# Altium PCB PCB1.PcbDoc
Units mm, origin at the board's own origin, x right, y up, seen from the top; angles counter-clockwise.
Board outline 40.64 x 67.69 mm, 2 copper layers (Top Layer, Bottom Layer); 11 components, 20 nets, 80 pads, 11 vias.
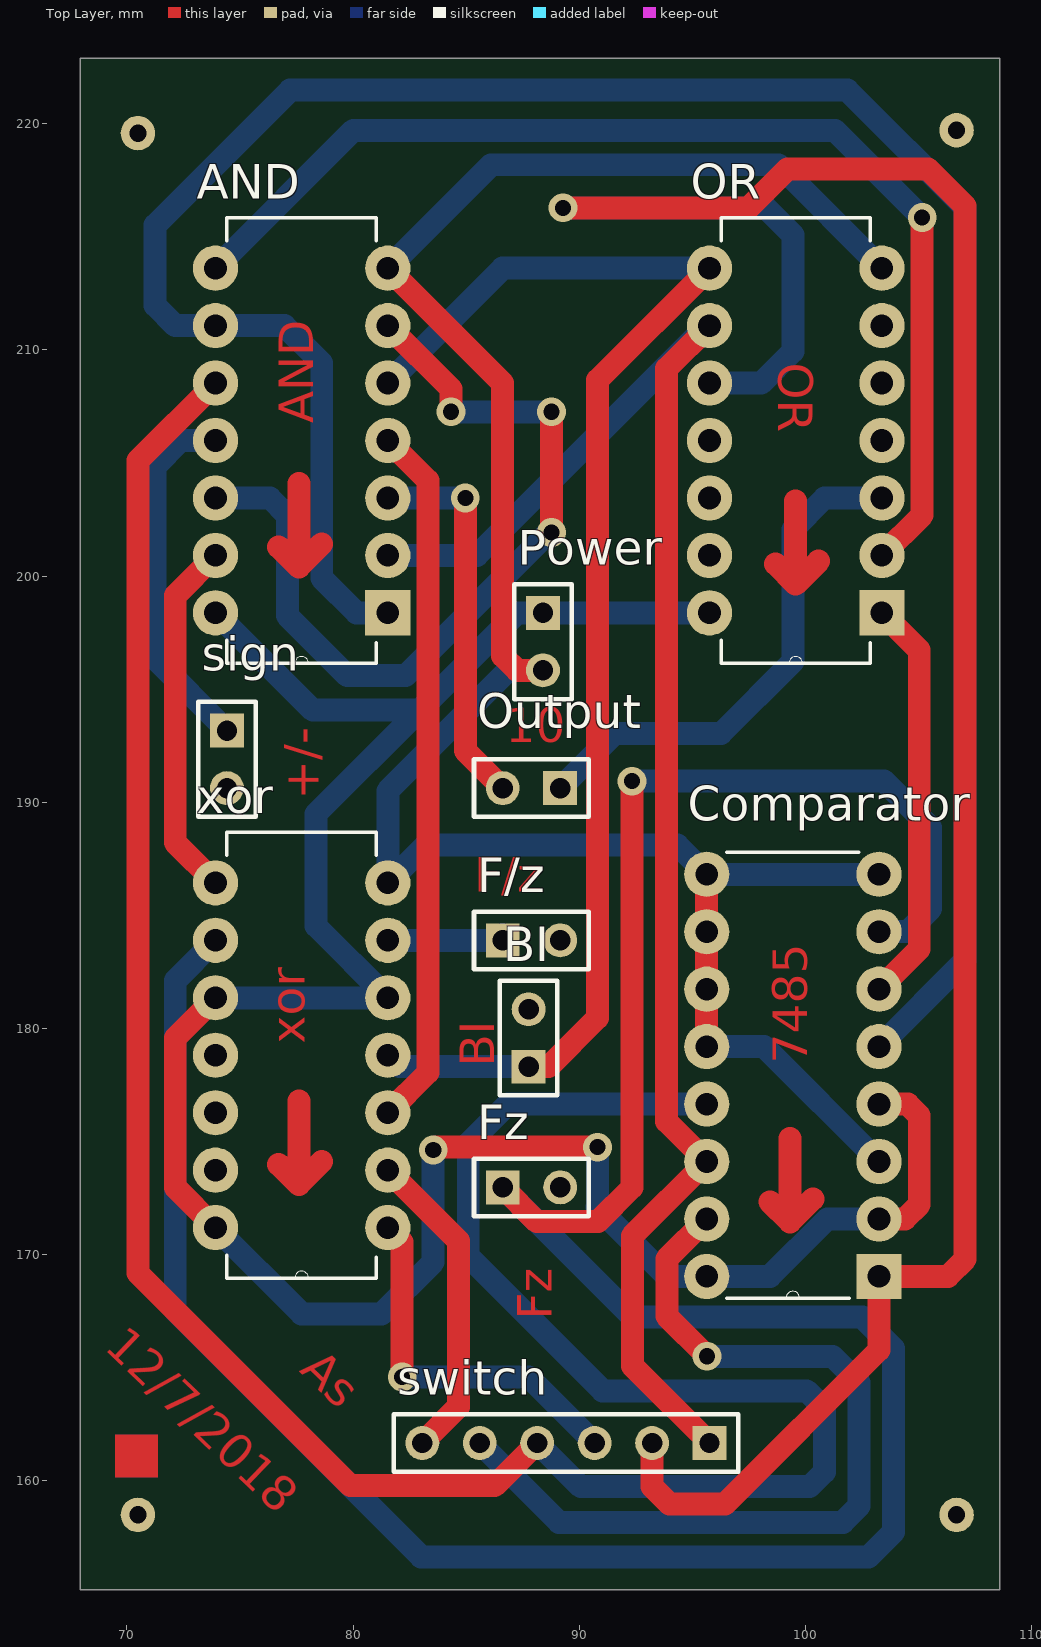
[diagram p0: Top Layer view]
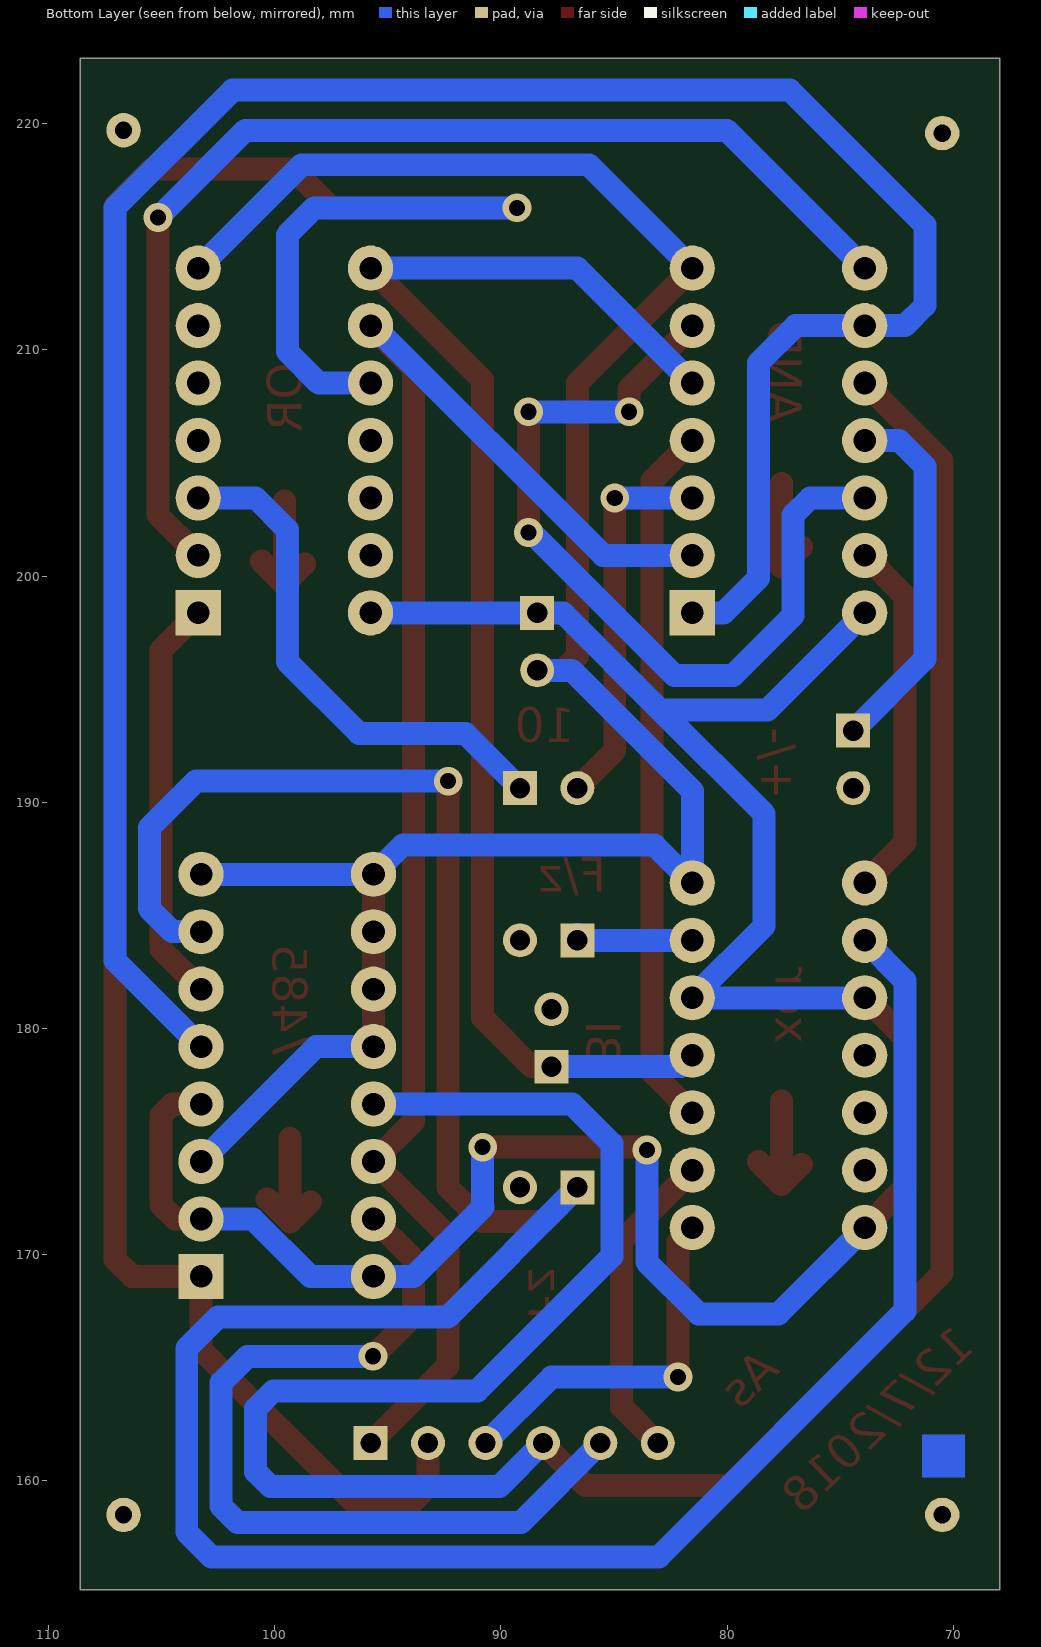
[diagram p1: Bottom Layer view, seen from below]

## Layer stack, top to bottom
Top Solder: solder mask 0.0102, Solder Resist, Dk 3.5
Top Layer: signal copper 0.0356
Dielectric 1: dielectric 0.32, FR-4, Dk 4.8
Bottom Layer: signal copper 0.0356
Bottom Solder: solder mask 0.0102, Solder Resist, Dk 3.5

## Board outline
67.945,155.194 67.945,222.885 108.585,222.885 108.585,155.194

## Design rules (kind name [scope] priority, off if disabled: settings)
Clearance [All] p1: gap=0.254 ignorepadtopadclearanceinfootprint=FALSE except(0: SMDPad-Hole THPad-Hole Via-Hole Fill-Hole Poly-Hole Region-Hole Text-Hole; 0.127: Arc-Hole Track-Hole; 0.508: Arc-Arc Arc-Track Track-Track)
PolygonConnect [All] p1: connectstyle=Relief reliefconductorwidth=0.254 reliefentries=4 polygonreliefangle="90 Angle" airgapwidth=0.254
RoutingVias [All] p1: holewidth=0.711 width=1.27 viastyle="Through Hole" minholewidth=0.711 minwidth=1.27 maxholewidth=0.711 maxwidth=1.27
SolderMaskExpansion [All] p1: expansion=0.102
Width [All] p1: maxlimit=1.016 minlimit=1.016 preferedwidth=1.016 minimp=50.000000 maximp=50.000000 favimp=50.000000
30 further rules are at their usual default settings.

## Components (designator, comment, footprint, x,y, rotation, side; value= is the part's Value field where it differs from the comment)
AND "SN74HC08N" DIP254P762X508-14#1 73.914,213.614 r180 top
BI "Header 2" HDR1X2 87.757,178.308 r90 top
Comparator "SN74LS85N" DIP254P762X508-16 95.631,186.817 r180 top
F/z "F/z" HDR1X2 86.614,183.896 r0 top
Fz "Header 2" HDR1X2 86.614,172.974 r0 top
OR "SN7432N" DIP254P762X508-14#1 95.758,213.614 r180 top
Output "outPut" HDR1X2 89.154,190.627 r180 top
Power "Header 2" HDR1X2 88.392,198.374 r270 top
sign "Sign" HDR1X2 74.422,193.167 r270 top
switch "Header 6" HDR1X6 95.758,161.671 r180 top
xor "SN74HC86N" DIP254P762X508-14#2 73.914,186.436 r180 top

## Footprints (in the part's own frame and the unit in brackets; to place one, negate y for a bottom-side part, rotate by r counter-clockwise, add the part's x,y. Pads: shape width x height; smd on the part's side, far side on the other; paste and mask are expansions set on the pad)
DIP254P762X508-14#1 [mm]
  rect 2x2 hole 1: 1(-7.62,15.24)
  round 2 hole 1: 2(-7.62,12.7) 3(-7.62,10.16) 4(-7.62,7.62) 5(-7.62,5.08) 6(-7.62,2.54) 7(-7.62,0) 8(0,0) 9(0,2.54) 10(0,5.08) 11(0,7.62) 12(0,10.16) 13(0,12.7) 14(0,15.24)
  silkscreen extent -7.11,-2.24 -0.51,17.48
DIP254P762X508-14#2 [mm]
  round 2 hole 1: 1(-7.62,15.24) 2(-7.62,12.7) 3(-7.62,10.16) 4(-7.62,7.62) 5(-7.62,5.08) 6(-7.62,2.54) 7(-7.62,0) 8(0,0) 9(0,2.54) 10(0,5.08) 11(0,7.62) 12(0,10.16) 13(0,12.7) 14(0,15.24)
  silkscreen extent -7.11,-2.24 -0.51,17.48
DIP254P762X508-16 [mm]
  rect 2x2 hole 1: 1(-7.62,17.78)
  round 2 hole 1: 2(-7.62,15.24) 3(-7.62,12.7) 4(-7.62,10.16) 5(-7.62,7.62) 6(-7.62,5.08) 7(-7.62,2.54) 8(-7.62,0) 9(0,0) 10(0,2.54) 11(0,5.08) 12(0,7.62) 13(0,10.16) 14(0,12.7) 15(0,15.24) 16(0,17.78)
  silkscreen extent -6.73,-0.97 -0.89,18.75
HDR1X2 [mm] "Connector; Header; 2 Position"
  rect 1.5x1.5 hole 0.9: 1(0,0)
  round 1.5 hole 0.9: 2(2.54,0)
  silkscreen extent -1.27,-1.27 3.81,1.27
HDR1X6 [mm] "Connector; Header; 6 Position"
  rect 1.5x1.5 hole 0.9: 1(0,0)
  round 1.5 hole 0.9: 2(2.54,0) 3(5.08,0) 4(7.62,0) 5(10.16,0) 6(12.7,0)
  silkscreen extent -1.27,-1.27 13.97,1.27

## Part data
AND: Package="PDIP-14 Signetics", Availability=Unavailable, MF="Texas Instruments", MP=SN74HC08N, Price=None, SnapEDA_Link=https://www.snapeda.com/parts/SN74HC08N/Texas%20Instruments/view-part/?ref=snap
BI Fz Power: "Header, 2-Pin", LatestRevisionDate=17-Jul-2002, LatestRevisionNote="Re-released for DXP Platform.", Publisher="Altium Limited"
Comparator: "Logic - Digital Comparators 4-bit binary or BCD Magnitude Comparator", Package="DIP-16 Texas Instruments", Availability=Unavailable, MF="Texas Instruments", MP=SN74LS85N, Price=None, SnapEDA_Link=https://www.snapeda.com/parts/SN74LS85N/Texas%20Instruments/view-part/?ref=snap
F/z Output sign: library part "Header 2", "Header, 2-Pin", LatestRevisionDate=17-Jul-2002, LatestRevisionNote="Re-released for DXP Platform.", Publisher="Altium Limited"
OR: "OR Gate 4-Element 2-IN Bipolar 14-Pin PDIP Tube", Package="DIP-14 Texas Instruments", Digi-Key_Part_Number=296-33610-5-ND, Digi-Key_Purchase_URL=https://www.digikey.com.eg/product-detail/en/texas-instruments/SN7432N/296-33610-5-ND/1575185?utm_source=snapeda&utm_medium=aggregator&utm_campaign=symbol, MF="Texas Instruments", MP=SN7432N, SnapEDA_Link=https://www.snapeda.com/parts/SN7432N/Texas%20Instruments/view-part/?ref=snap
switch: "Header, 6-Pin", LatestRevisionDate=17-Jul-2002, LatestRevisionNote="Re-released for DXP Platform.", Publisher="Altium Limited"
xor: "IC: digital; inverter; XOR; Channels: 4; THT; DIP14; Series: HC", Package="SOP-14 Texas Instruments", Availability=Unavailable, MF="Texas Instruments", MP=SN74HC86N, Price=None, SnapEDA_Link=https://www.snapeda.com/parts/SN74HC86N/Texas%20Instruments/view-part/?ref=snap

## Free pads (board coordinates)
  round 1.524 hole 0.762: 3(106.68,158.496) 4(70.485,219.583) 5(106.68,219.71) 6(70.485,158.496)

## Via types
v1: diameter 1.27, hole 0.711, Top Layer to Bottom Layer, 11 vias

## Nets (pads, with @x,y where several pads share a name; then routed paths per layer and width w, separated by ;. In a path a pad name is that pad's centre, name@x,y a point inside that pad or via, vN(x,y) a via of type N, cw(c..) or ccw(c..) an arc to the next point about the centre after c; other vN are vias at no path point)
GND: AND.7 Comparator.3 Comparator.8 Comparator.9 Comparator.10 Comparator.11 Comparator.12 OR.7 Power.2 xor.7 | length 100.3
  Top Layer w1.016: AND.7 86.614,208.534 86.614,196.469 87.249,195.834 Power.2 ; Comparator.12 Comparator.11 Comparator.10 Comparator.9
  Bottom Layer w1.016: AND.7 86.106,218.186 98.806,218.186 OR.7 ; Power.2 86.864,195.834 81.534,190.504 xor.7 83.21,188.112 94.336,188.112 Comparator.9 Comparator.8 ; Comparator.12 98.171,179.197 Comparator.3
NetAND_1: AND.1 AND.9 Comparator.5 | length 104.1
  Bottom Layer w1.016: AND.1 80.149,198.374 78.613,199.91 78.613,209.423 76.962,211.074 AND.9 72.136,211.074 71.247,211.963 71.247,215.519 77.216,221.488 101.854,221.488 107.061,216.281 107.061,183.007 Comparator.5
NetAND_2: AND.2 Comparator.14 OR.9 switch.1 | length 72.1
  Top Layer w1.016: switch.1 92.345,165.084 92.345,170.831 Comparator.14 93.853,175.895 93.853,209.169 OR.9
  Bottom Layer w1.016: AND.2 85.478,200.914 95.638,211.074 OR.9
NetAND_3: AND.3 Output.2 | length 16.9
  Top Layer w1.016: v1(84.963,203.454) 84.963,192.278 Output.2
  Bottom Layer w1.016: AND.3 v1(84.963,203.454)
NetAND_4: AND.4 xor.3 | length 31.2
  Top Layer w1.016: xor.3 83.312,178.054 83.312,204.216 AND.4
NetAND_5: AND.5 BI.1 OR.8 xor.4 | length 61.9
  Top Layer w1.016: BI.1 88.646,178.308 90.805,180.467 90.805,208.661 OR.8
  Bottom Layer w1.016: xor.4 82.042,178.308 BI.1 ; AND.5 86.614,213.614 OR.8
NetAND_6: AND.6 AND.12 | length 38.1
  Top Layer w1.016: AND.6 84.328,208.28 v1(84.328,207.264) ; v1(88.773,201.93) v1(88.773,207.264)
  Bottom Layer w1.016: AND.12 76.327,203.454 77.089,202.692 77.089,198.247 79.74,195.596 82.316,195.596 88.65,201.93 v1(88.773,201.93) ; v1(84.328,207.264) v1(88.773,207.264)
NetAND_8: AND.8 OR.2 | length 51
  Top Layer w1.016: OR.2 105.156,202.692 v1(105.156,215.849)
  Bottom Layer w1.016: AND.8 80.01,219.71 101.295,219.71 v1(105.156,215.849)
NetAND_10: AND.10 Comparator.13 switch.4 | length 114.4
  Top Layer w1.016: AND.10 70.485,205.105 70.485,169.189 79.883,159.791 86.258,159.791 switch.4
  Bottom Layer w1.016: switch.4 90.068,159.741 100.178,159.741 100.838,160.401 100.838,163.195 100.051,163.982 91.034,163.982 85.09,169.926 85.09,174.904 86.843,176.657 Comparator.13
NetAND_11: AND.11 sign.1 | length 16.1
  Bottom Layer w1.016: AND.11 72.39,205.994 71.247,204.851 71.247,196.342 sign.1
NetAND_13: AND.13 xor.8 | length 16
  Top Layer w1.016: xor.8 72.136,188.214 72.136,199.136 AND.13
NetComparator_1: Comparator.1 OR.10 switch.2 | length 108.3
  Top Layer w1.016: v1(89.281,216.281) 97.485,216.281 99.212,218.008 105.41,218.008 107.061,216.357 107.061,169.799 106.299,169.037 Comparator.1 103.251,165.786 96.444,158.979 93.98,158.979 93.218,159.741 switch.2
  Bottom Layer w1.016: v1(89.281,216.281) 98.247,216.281 99.441,215.087 99.441,209.931 98.044,208.534 OR.10
NetComparator_6: Comparator.6 OR.1 | length 18.1
  Top Layer w1.016: Comparator.6 105.029,183.515 105.029,196.723 OR.1
NetComparator_7: Comparator.7 Fz.1 xor.9 | length 127.4
  Top Layer w1.016: Fz.1 88.126,171.462 90.821,171.462 92.329,172.97 v1(92.329,190.932)
  Bottom Layer w1.016: xor.9 72.136,182.118 72.136,167.513 83.007,156.642 102.794,156.642 103.886,157.734 103.886,165.862 102.514,167.234 92.354,167.234 Fz.1 ; v1(92.329,190.932) 103.48,190.932 105.537,188.874 105.537,185.293 104.521,184.277 Comparator.7
NetComparator_15: Comparator.15 switch.5 | length 38.7
  Top Layer w1.016: Comparator.15 93.869,169.815 93.869,167.284 v1(95.647,165.506)
  Bottom Layer w1.016: switch.5 89.103,158.166 101.651,158.166 102.362,158.877 102.362,164.338 101.194,165.506 v1(95.647,165.506)
NetF/z_1: F/z.1 xor.6 | length 5.2
  Bottom Layer w1.016: xor.6 86.36,183.896 F/z.1@86.614,184.15
NetOR_3: OR.3 Output.1 | length 23
  Bottom Layer w1.016: Output.1 91.567,193.04 96.266,193.04 99.441,196.215 99.441,202.057 100.838,203.454 OR.3
Netswitch_3: switch.3 xor.1 | length 16.6
  Top Layer w1.016: xor.1 82.169,170.561 v1(82.169,164.592)
  Bottom Layer w1.016: v1(82.169,164.592) 87.757,164.592 switch.3
Netswitch_6: switch.6 xor.2 | length 14
  Top Layer w1.016: xor.2 84.655,170.615 84.655,163.268 switch.6
VCC: AND.14 Comparator.2 Comparator.4 Comparator.16 OR.14 Power.1 xor.5 xor.10 xor.14 | length 110.4
  Top Layer w1.016: xor.14 72.136,172.974 72.136,179.578 xor.10 ; v1(83.541,174.625) 83.668,174.752 v1(90.805,174.752) ; Comparator.2 104.394,171.577 105.029,172.212 105.029,176.149 104.521,176.657 Comparator.4
  Bottom Layer w1.016: xor.14 77.724,167.386 81.255,167.386 83.541,169.672 v1(83.541,174.625) ; xor.10 xor.5 78.359,184.531 78.359,189.484 82.947,194.072 ; AND.14 78.216,194.072 82.947,194.072 ; v1(90.805,174.752) 90.805,172.136 90.78,172.11 93.853,169.037 Comparator.16 98.425,169.037 100.965,171.577 Comparator.2 ; OR.14 Power.1 87.249,198.374 82.947,194.072
pads on no net: BI.2 F/z.2 Fz.2 OR.4 OR.5 OR.6 OR.11 OR.12 OR.13 sign.2 xor.11 xor.12 xor.13
copper on no net: | length 25.5
  Top Layer w1.016: 76.708,173.99 77.597,173.101 ; 76.708,201.295 77.597,200.406 ; 77.597,176.784 77.597,173.101 ; 77.597,204.089 77.597,200.406 ; 78.613,174.117 77.597,173.101 ; 78.613,201.422 77.597,200.406 ; 98.425,172.339 99.314,171.45 ; 98.679,200.533 99.568,199.644 ; 99.314,175.133 99.314,171.45 ; 99.568,203.327 99.568,199.644 ; 100.33,172.466 99.314,171.45 ; 100.584,200.66 99.568,199.644

## Other copper
Top Layer:
  rectangle: 69.469,160.147 71.374,162.052
  text "OR" at 98.806,209.423 h1.52 r270
  text "AND" at 78.232,206.756 h1.52 r90
  text "10" at 86.741,192.659 h1.52
  text "+/-" at 78.486,190.119 h1.52 r90
  text "F/z" at 85.344,186.055 h1.52
  text "xor" at 77.851,179.324 h1.52 r90
  text "7485" at 100.076,178.435 h1.52 r90
  text "BI" at 86.233,178.308 h1.52 r90
  text "Fz" at 88.773,167.132 h1.52 r90
  text "12/7/2018" at 68.961,165.862 h1.52 r316.19
  text "As" at 77.597,164.846 h1.52 r316.08
Bottom Layer:
  rectangle: 69.469,160.147 71.374,162.052

## Silkscreen, mask and mechanical layers (free items; w line width, h text height)
Drill Guide:
  the board outline again, w1.016
Mechanical 13:
  lines w0.254: -0.127,0 0,0.127
  lines w0.508: 0,209.296 0.254,209.55 ; 577.723,0 577.85,0.127 ; 577.723,209.677 577.85,209.55